# Altium PCB Power_Board_5V.PcbDoc
Units mm, origin at the board's own origin, x right, y up, seen from the top; angles counter-clockwise.
Board outline 56.13 x 18.16 mm, 2 copper layers (Top Layer, Bottom Layer); 8 components, 4 nets, 17 pads, 0 vias.
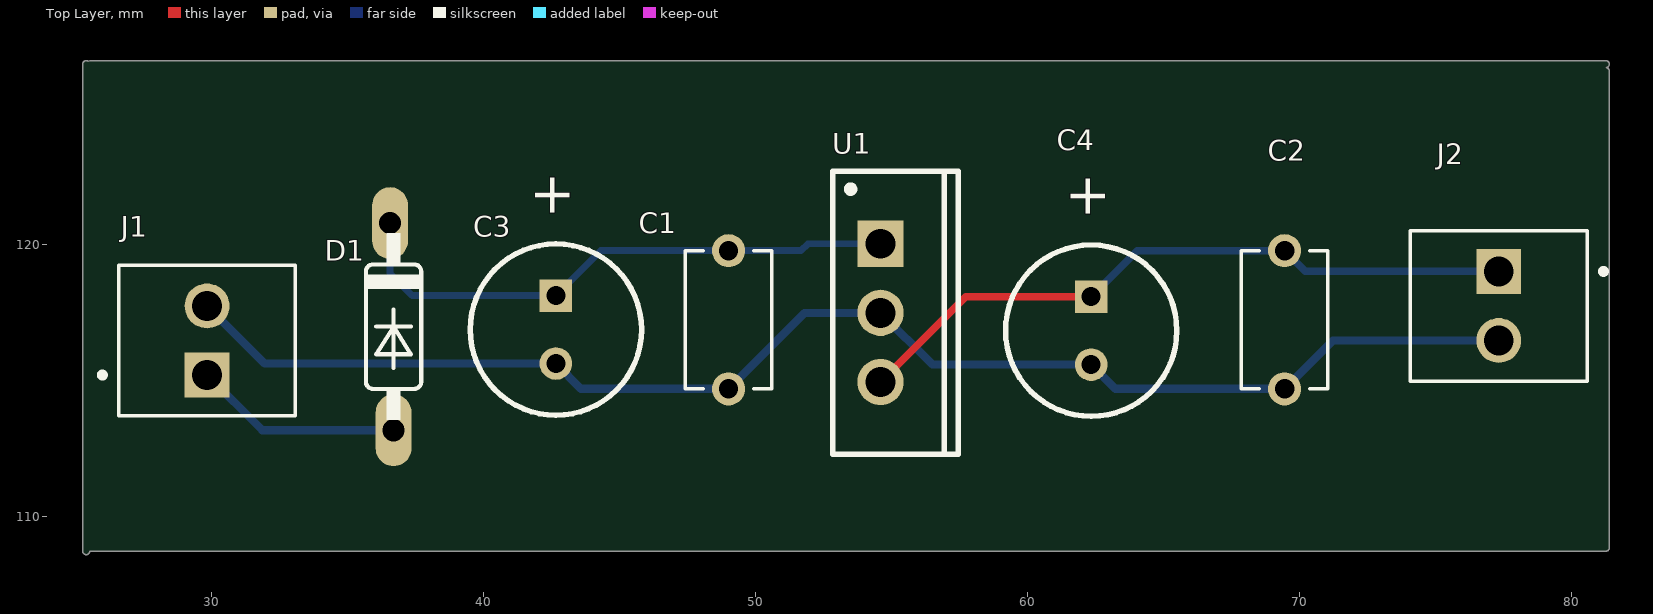
[diagram p0: Top Layer view]
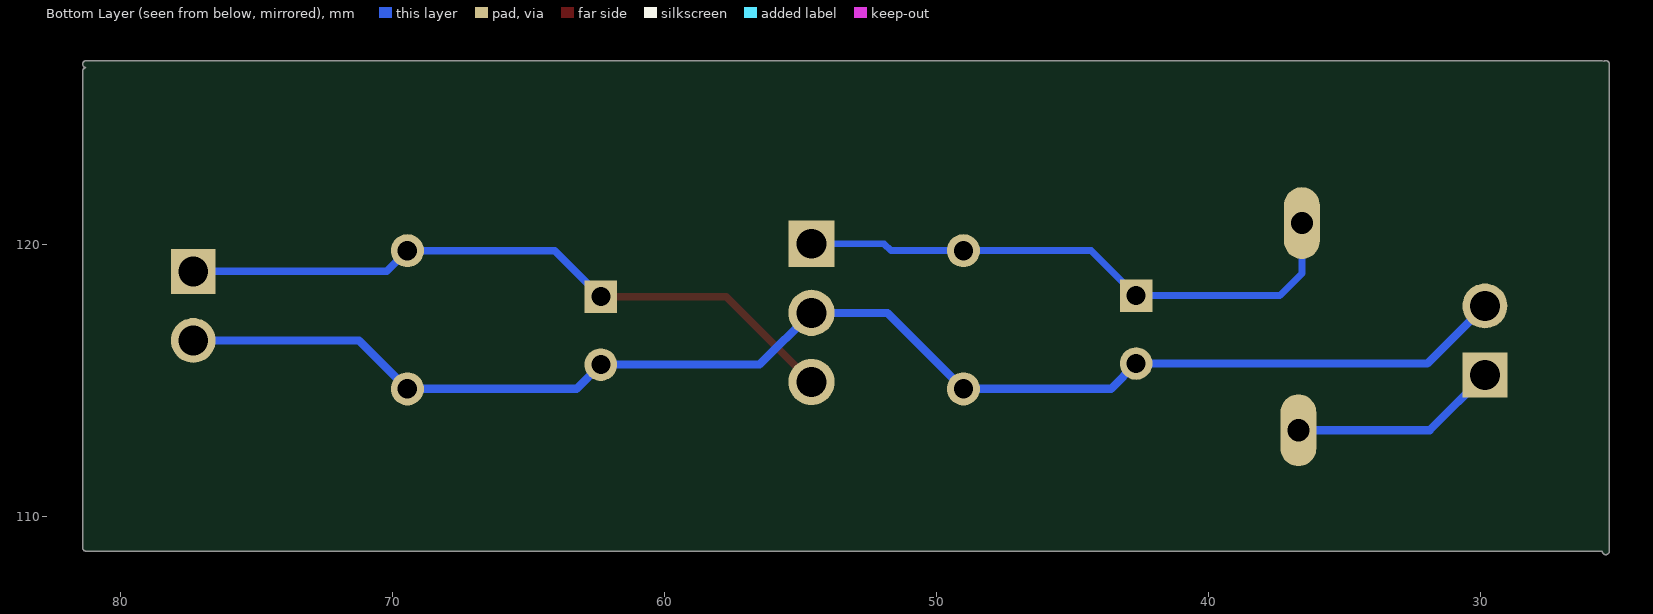
[diagram p1: Bottom Layer view, seen from below]
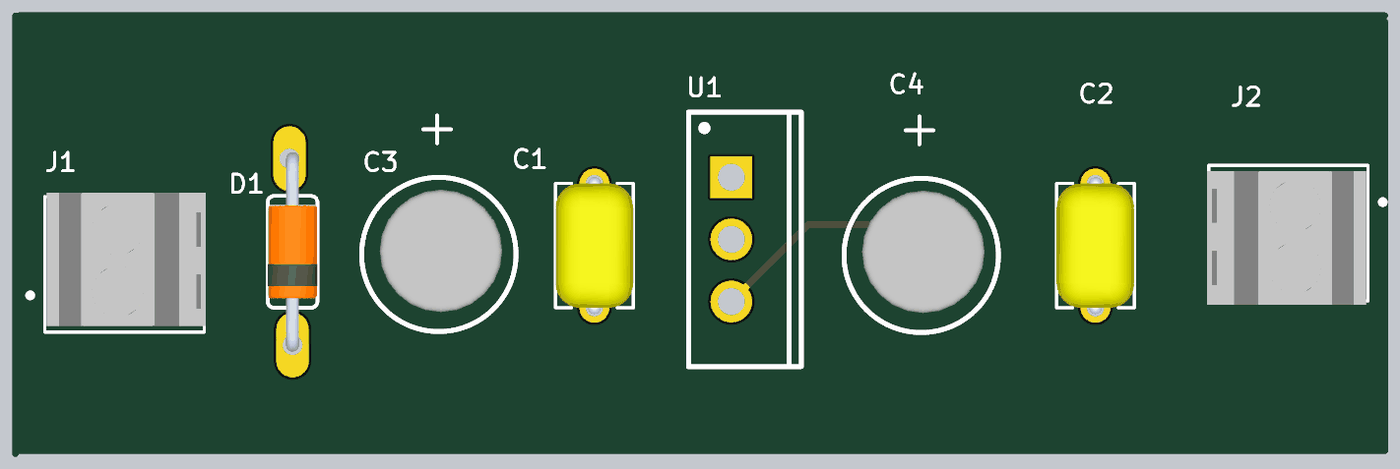
[diagram p2: 3D render of the assembled board from above, using the file's embedded part models]

## Layer stack, top to bottom
Top Solder: solder mask 0.0102, Solder Resist, Dk 3.5
Top Layer: signal copper 0.0356
Dielectric 1: dielectric 0.32, FR-4, Dk 4.8
Bottom Layer: signal copper 0.0356
Bottom Solder: solder mask 0.0102, Solder Resist, Dk 3.5

## Board outline
25.273,108.712 ccw(c25.4,108.712) 25.527,108.712 81.28,108.712 ccw(c81.28,108.839) 81.407,108.839 81.407,126.365 ccw(c81.28,126.365) 81.29,126.492 ccw(c81.28,126.619) 81.407,126.619 ccw(c81.28,126.619) 81.28,126.746 25.527,126.746 25.463,126.729 ccw(c25.4,126.619) 25.273,126.619

## Design rules (kind name [scope] priority, off if disabled: settings)
Clearance [All] p1: gap=0.1 ignorepadtopadclearanceinfootprint=FALSE
PolygonConnect [All] p1: connectstyle=Relief reliefconductorwidth=0.254 reliefentries=4 polygonreliefangle="90 Angle" airgapwidth=0.254
RoutingCorners [All] p1: cornerstyle=Round minsetback=2.54 maxsetback=2.54
RoutingPriority [InNet('+12V')] p1: routingpriority=1
RoutingTopology [All] p1: topology=Horizontal
RoutingVias [All] p1: holewidth=0.711 width=1.27 viastyle="Through Hole" minholewidth=0.711 minwidth=1.27 maxholewidth=0.711 maxwidth=1.27
SolderMaskExpansion [All] p1: expansion=0.102 istentingtop=FALSE
SupplyNets "Schematic Supply Nets_2" [InNet('GND')] p1: voltage=0.000
SupplyNets "Schematic Supply Nets_1" [InNet('+12V')] p2: voltage=0.000
SupplyNets "Schematic Supply Nets" [InNet('+5V')] p3: voltage=0.000
UnRoutedNet [All] p1: checkbadconnections=TRUE
Width GND [InNet('GND')] p1: maxlimit=0.3 minlimit=0.3 preferedwidth=0.3 minimp=50.000000 maximp=50.000000 favimp=50.000000
Width +5V [InNet('+5V')] p2: maxlimit=0.28 minlimit=0.28 preferedwidth=0.28 minimp=50.000000 maximp=50.000000 favimp=50.000000
Width +12V [InNet('+12V')] p3: maxlimit=0.3 minlimit=0.3 preferedwidth=0.3 minimp=50.000000 maximp=50.000000 favimp=50.000000
Width [All] p4: maxlimit=0.254 minlimit=0.254 preferedwidth=0.254
26 further rules are at their usual default settings.

## Components (designator, comment, footprint, x,y, rotation, side; value= is the part's Value field where it differs from the comment)
C1 "Cap" "cap ceramic down" 49.022,117.221 r270 top value=100nF
C2 "Cap" "cap ceramic down" 69.469,117.221 r90 top value=100nF
C3 "Cap Pol1" "cap pol" 42.672,116.88 r90 top value=330nF
C4 "Cap Pol1" "cap pol" 62.357,116.84 r90 top value=10nF
D1 "Diode 10TQ035" DO-35 36.703,116.967 r270 top
J1 "Header 2" Con-2 29.845,116.459 r90 top
J2 "Header 2" Con-2 77.343,117.729 r270 top
U1 "L7805CV" TO220 54.61,117.475 r270 top

## Footprints (in the part's own frame and the unit in brackets; to place one, negate y for a bottom-side part, rotate by r counter-clockwise, add the part's x,y. Pads: shape width x height; smd on the part's side, far side on the other; paste and mask are expansions set on the pad)
"cap ceramic down" [mm]
  round 1.218 hole 0.71: 1(-2.54,0) 2(2.54,0)
  silkscreen extent -2.54,-1.59 2.54,1.59, body extent -2.79,-1.59 2.79,1.59, height 5.86
"cap pol" [mm]
  rect 1.2x1.2 hole 0.7: 1(1.23,0)
  round 1.2 hole 0.7: 2(-1.27,0)
  silkscreen extent -3.17,-3.15 3.13,3.15, body extent -2.37,-2.59 2.63,2.41, height 11
Con-2 [mm]
  rect 1.65x1.65 hole 1.1: 1(-1.27,0)
  round 1.65 hole 1.1: 2(1.27,0)
  silkscreen extent -2.77,-3.25 2.77,3.95, body extent -2.53,-3.33 2.92,3.17, height 10
DO-35 [mil]
  oval 104x52 hole 32: 1(-150,-5) 3(150,0)
  silkscreen extent -135,-40 135,40, body extent -160,-40 160,40, height 87
TO220 [mm] "TO, Thru-Hole, Vertical, Heatsink Mounted; 3 In-Line Leads; Pitch 2.54 mm"
  rect 1.7x1.7 hole 1.1: 1(-2.54,0)
  round 1.7 hole 1.1: 2(0,0) 3(2.54,0)
  silkscreen extent -5.2,-1.75 5.2,2.85, body extent -5.25,-1.8 5.25,2.9, height 19.7

## Part data
C1 C2: "Capacitor", LatestRevisionDate=17-Jul-2002, LatestRevisionNote="Re-released for DXP Platform.", PackageDescription="Radial Cap, Thru-Hole; 2 Leads; 0.3 in Pin Spacing", PackageReference=RAD-0.3, Published=8-Jun-2000, Publisher="Altium Limited"
C3 C4: "Polarized Capacitor (Radial)", LatestRevisionDate=17-Jul-2002, LatestRevisionNote="Re-released for DXP Platform.", PackageDescription="Polarized Capacitor (Radial); 2 Leads", PackageReference=RB7.6-15, Published=8-Jun-2000, Publisher="Altium Limited"
D1: "Schottky Rectifier", ComponentLink1Description="Manufacturer Link", ComponentLink1URL=http://www.irf.com/, ComponentLink2Description=Datasheet, ComponentLink2URL=http://www.irf.com/product-info/datasheets/data/10tq.pdf, DatasheetVersion=PD-2.057B, LatestRevisionDate=17-Jul-2002, LatestRevisionNote="Re-released for DXP Platform.", Note="Terminal 2 is the TAB and is electrically connected to the cathode", PackageDescription="TO, Thru-Hole, Vertical, Heatsink Mounted; 3 In-Line Leads (1 Absent); Pitch 2.54 mm", PackageReference=TO-220AC, PackageVersion=Feb-1998, Published=8-Jun-2000, Publisher="Altium Limited"
J1 J2: "Header, 2-Pin", LatestRevisionDate=17-Jul-2002, LatestRevisionNote="Re-released for DXP Platform.", Publisher="Altium Limited"
U1: library part CMP-0244-00483-1, "Positive Voltage Regulator, 5V, 3-Pin TO-220", ComponentLink1Description="Manufacturer URL", ComponentLink1URL=http://www.st.com, ComponentLink2Description=Datasheet, ComponentLink2URL=http://www.st.com/internet/com/TECHNICAL_RESOURCES/TECHNICAL_LITERATURE/DATASHEET/CD00000444.pdf, ComponentLink3Description="Package Specification", ComponentLink3URL=http://www.st.com/internet/com/TECHNICAL_RESOURCES/TECHNICAL_LITERATURE/PACKAGE_INFORMATION/CD00004649.pdf, DatasheetVersion=16/11/2011, PackageDescription="TO, Thru-Hole, Vertical, Heatsink Mounted; 3 In-Line Leads; Pitch 2.54 mm", PackageReference=TO220, PackageVersion=ver3.0

## Nets (pads, with @x,y where several pads share a name; then routed paths per layer and width w, separated by ;. In a path a pad name is that pad's centre, name@x,y a point inside that pad or via, vN(x,y) a via of type N, cw(c..) or ccw(c..) an arc to the next point about the centre after c; other vN are vias at no path point)
+5V: C2.2 C4.1 J2.1 U1.3 | length 25
  Top Layer w0.28: U1.3 57.745,118.07 C4.1
  Bottom Layer w0.28: C4.1 64.048,119.761 C2.2 70.231,118.999 J2.1
+12V: D1.3 J1.1 | length 7.7
  Bottom Layer w0.3: J1.1 31.877,113.157 D1.3
GND: C1.2 C2.1 C3.2 C4.2 J1.2 J2.2 U1.2 | length 51.8
  Bottom Layer w0.3: J1.2 31.964,115.61 C3.2 43.601,114.681 C1.2 51.816,117.475 U1.2 56.515,115.57 C4.2 63.246,114.681 C2.1 71.247,116.459 J2.2
NetC1_1: C1.1 C3.1 D1.1 U1.1 | length 21
  Bottom Layer w0.254: D1.1 36.576,118.923 37.389,118.11 C3.1 44.323,119.761 C1.1 51.689,119.761 51.943,120.015 U1.1

## Silkscreen, mask and mechanical layers (free items; w line width, h text height)
Mechanical 1:
  lines w0.254: 25.4,126.619 25.4,108.712 25.527,108.839 81.28,108.839 81.28,126.365 81.28,126.619 25.527,126.619

## Text inside footprints (layer, text, board x,y; h text height)
C3: Top Overlay "+" at 43.18,120.944 h1.5 r90
C4: Top Overlay "+" at 62.865,120.904 h1.5 r90